# Altium PCB Arduino_4_Layer.PcbDoc
Units mil, origin at the board's own origin, x right, y up, seen from the top; angles counter-clockwise.
Board outline 2700 x 2200 mil, 4 copper layers (Top Layer, Layer 1, Layer 2, Bottom Layer), stack 23.756 mil thick; 54 components, 52 nets, 271 pads, 25 vias.
Unrouted connection lines stored in the file: 91.
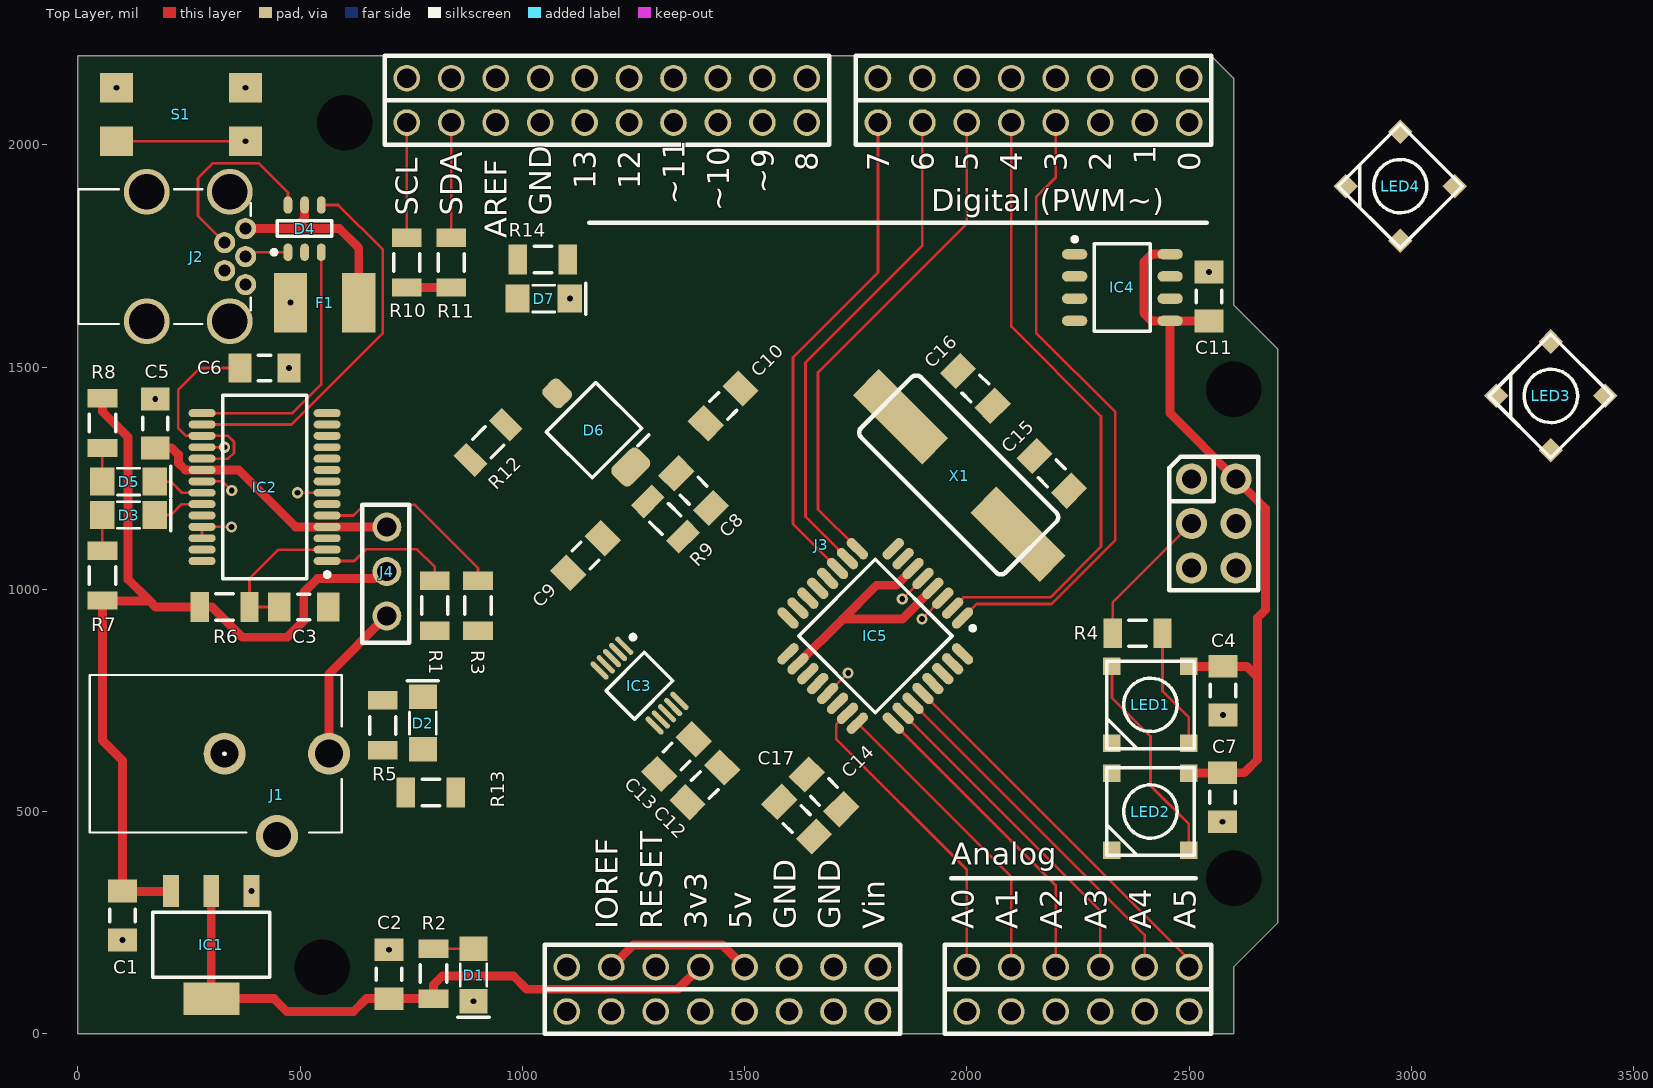
[diagram p0: Top Layer view]
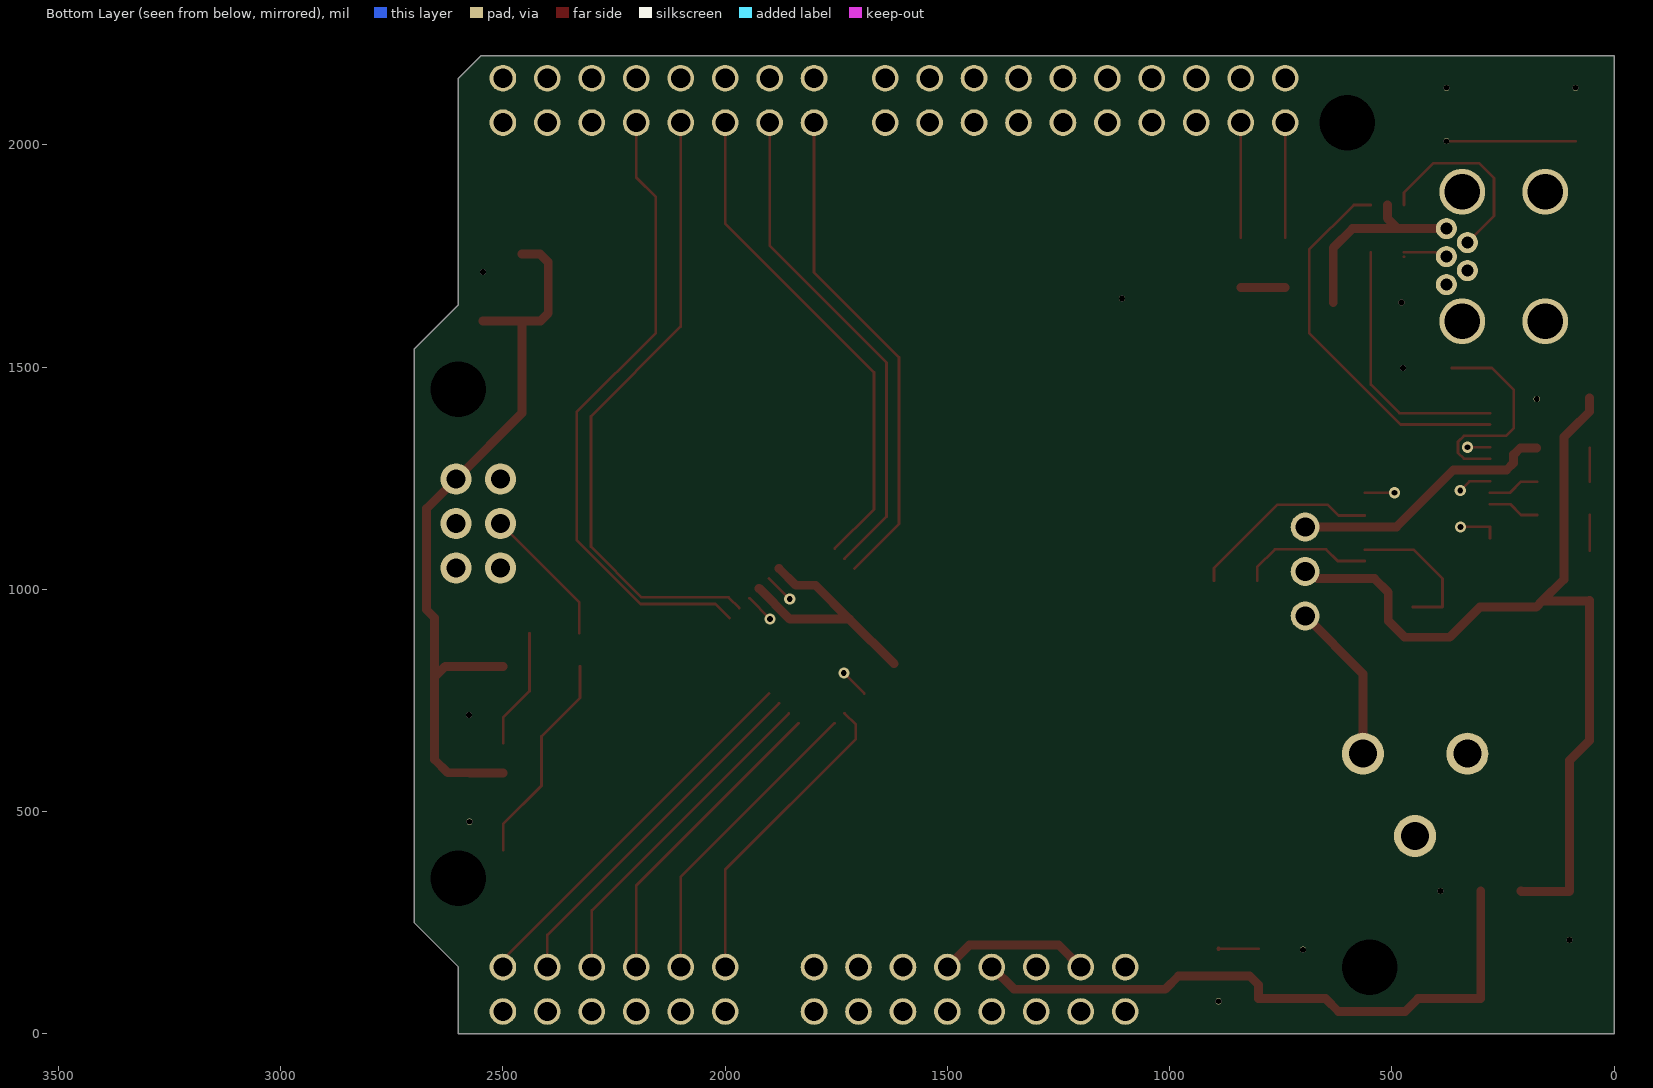
[diagram p1: Bottom Layer view, seen from below]
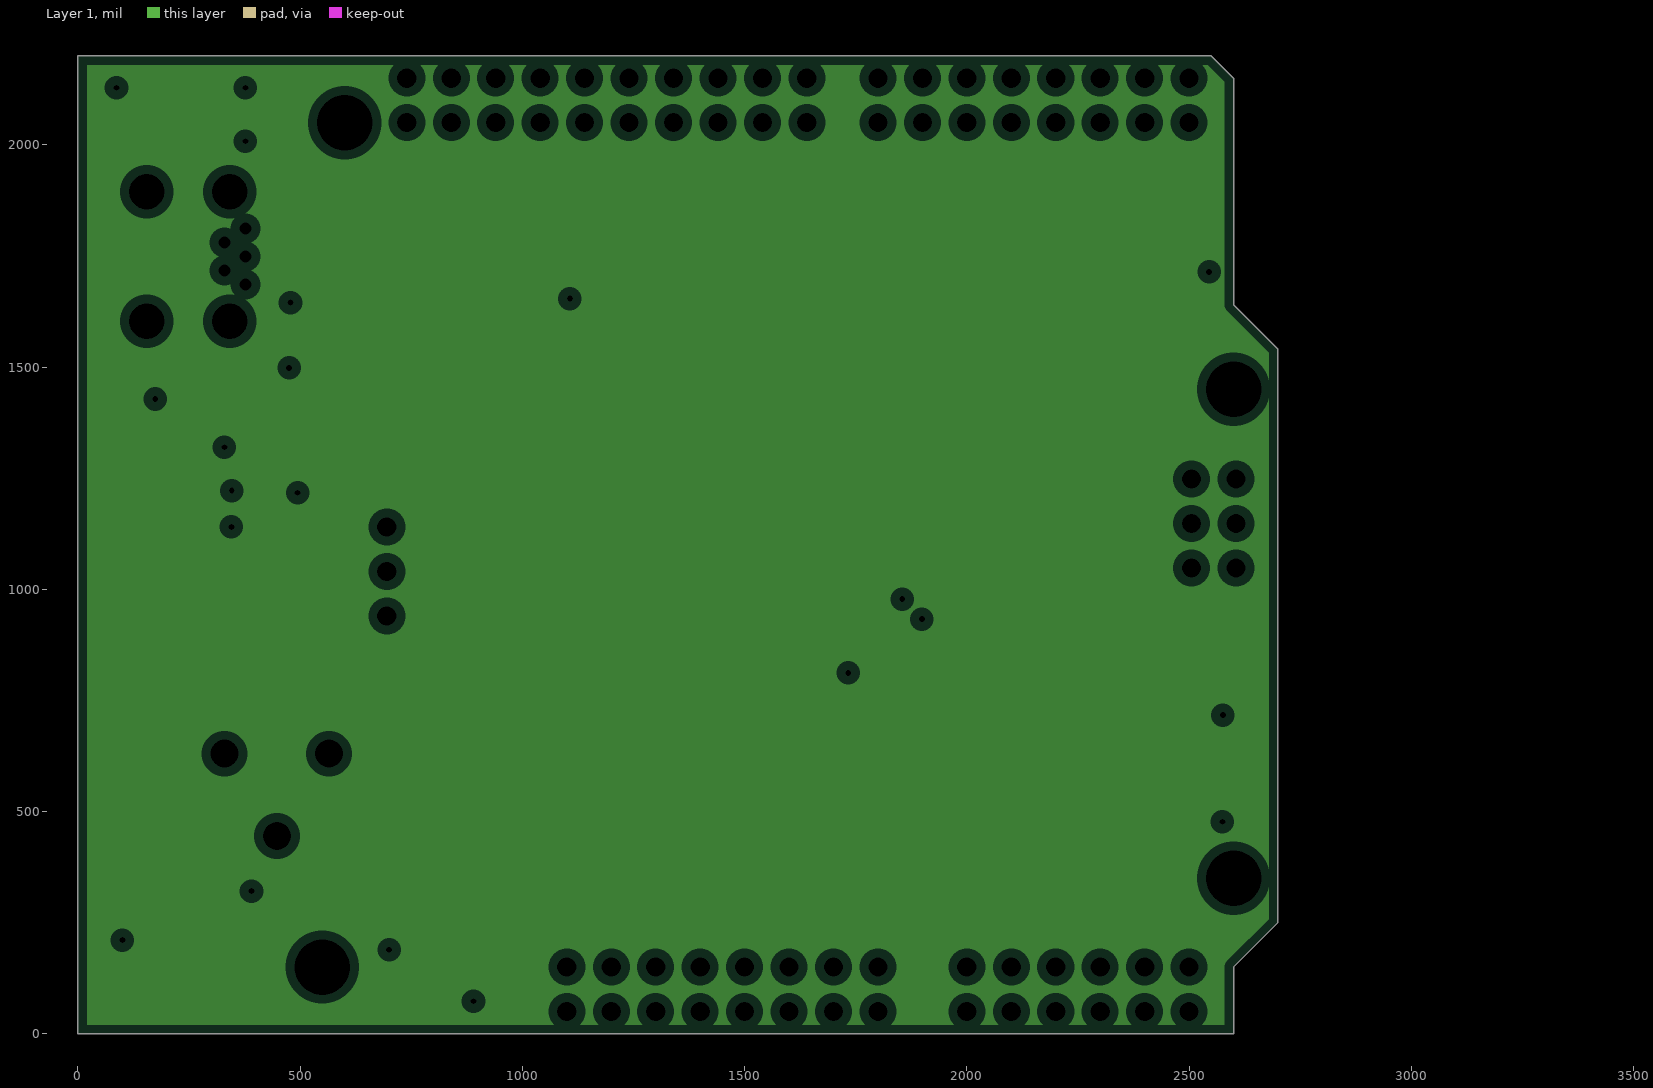
[diagram p2: Layer 1, clearances drawn from the general rule]
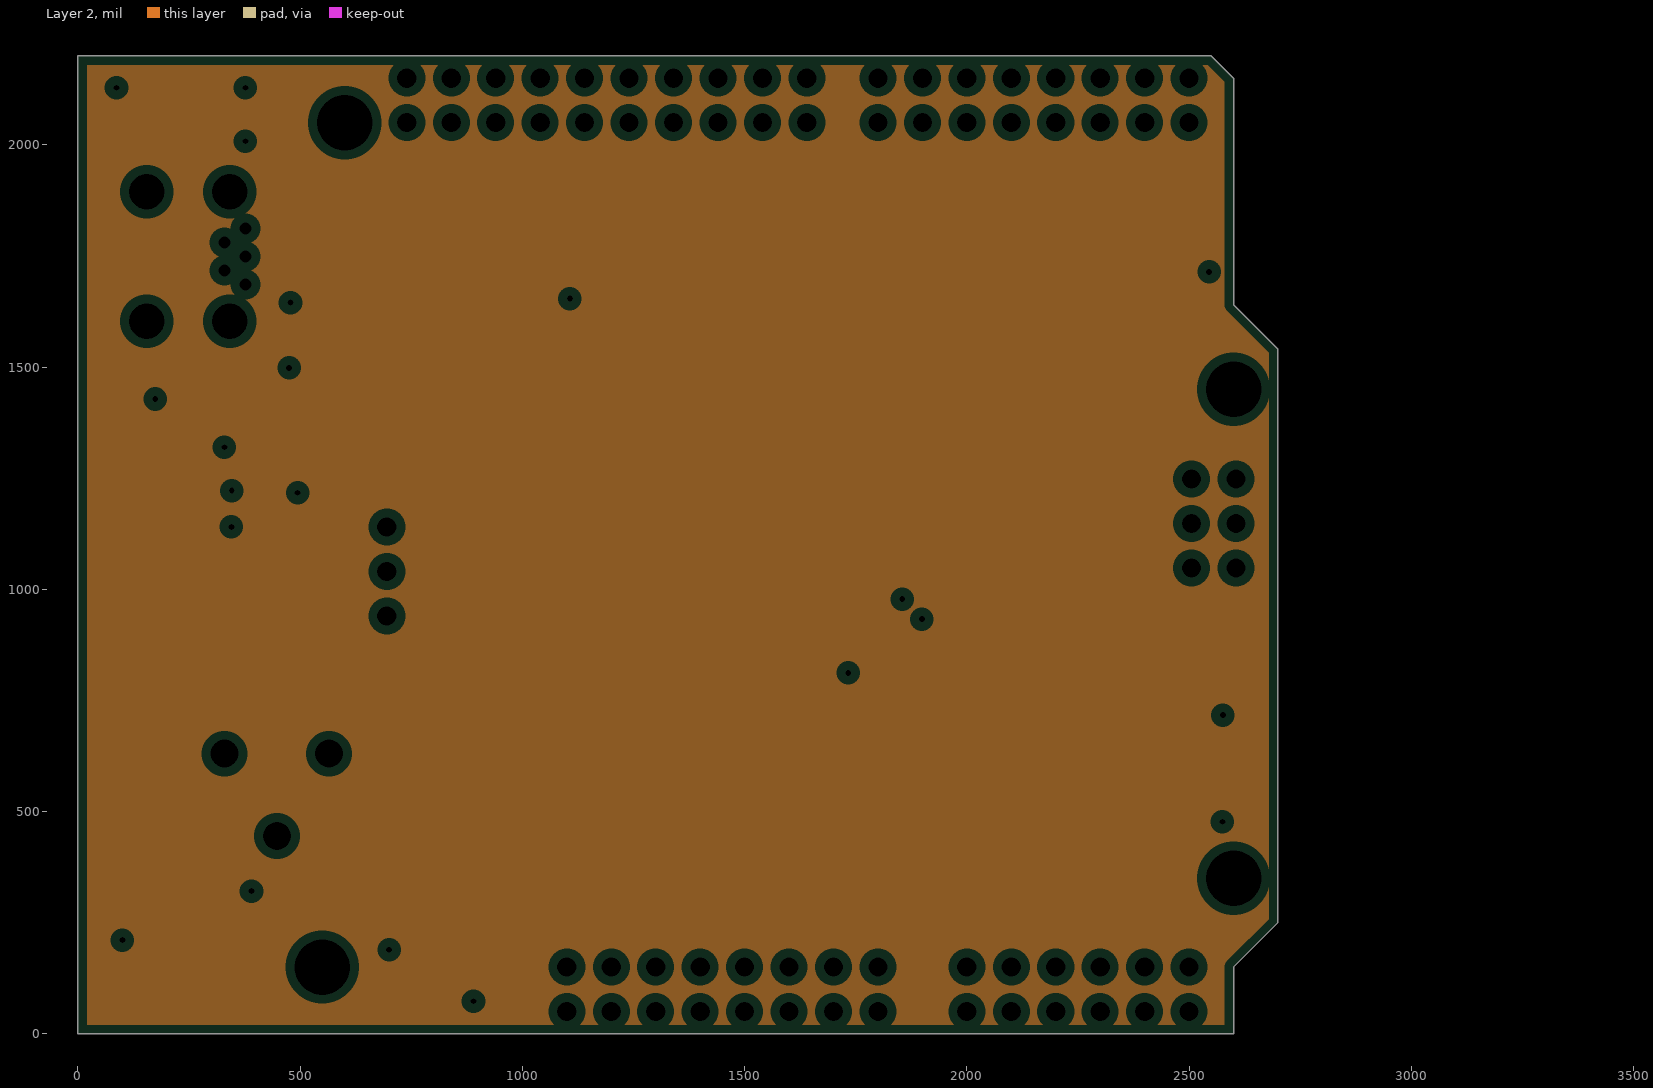
[diagram p3: Layer 2, clearances drawn from the general rule]

## Layer stack, top to bottom
Top Solder: solder mask 0.4, Solder Resist, Dk 3.5
Top Layer: signal copper 1.4
Dielectric 2: prepreg 2.8, PP-006, Dk 4.1
Layer 1: plane copper 1.3779
Dielectric 1: dielectric 12.6, FR-4, Dk 4.8
Layer 2: plane copper 1.3779
Dielectric 3: prepreg 2.8, PP-006, Dk 4.1
Bottom Layer: signal copper 1.4
Bottom Solder: solder mask 0.4, Solder Resist, Dk 3.5

## Board outline
2600,2150 2550,2200 0,2200 0,0 2600,0 2600,150 2700,250 2700,1540 2600,1640

## Design rules (kind name [scope] priority, off if disabled: settings)
Clearance [All] p1: gap=6 ignorepadtopadclearanceinfootprint=FALSE except(0: Arc-Hole Track-Hole SMDPad-Hole THPad-Hole Via-Hole Fill-Hole Poly-Hole Region-Hole Text-Hole)
PlaneClearance [All] p1: clearance=20
PlaneConnect [All] p1: pad.planeconnectstyle=Relief pad.reliefexpansion=20 pad.reliefentries=4 pad.reliefconductorwidth=10 pad.reliefairgap=10 via.planeconnectstyle=Direct via.reliefexpansion=20 via.reliefentries=4 via.reliefconductorwidth=10 via.reliefairgap=10
PolygonConnect [All] p1: connectstyle=Relief reliefconductorwidth=10 reliefentries=4 polygonreliefangle="90 Angle" airgapwidth=10
RoutingVias [All] p1: holewidth=13 width=25 viastyle="Through Hole" minholewidth=13 minwidth=25 maxholewidth=25 maxwidth=50
SolderMaskExpansion [All] p1: expansion=4
Width [All] p1: maxlimit=20 minlimit=6 preferedwidth=10 minimp=50.000000 maximp=50.000000 favimp=50.000000
28 further rules are at their usual default settings.

## Components (designator, comment, footprint, x,y, rotation, side; value= is the part's Value field where it differs from the comment)
C1 "22uF" CAP1206 100,265.94 r270 top value="CAP CER 22UF 16V X5R 1206"
C2 "22uF" CAP1206 700,134.06 r270 top value="CAP CER 22UF 16V X5R 1206"
C3 "1uF" CAP1206 508,960 r0 top value="CAP CER 1UF 16V X7R 1206"
C4 "22uF" CAP1206 2576,772 r90 top value="CAP CER 22UF 16V X5R 1206"
C5 "22uF" CAP1206 174,1373 r270 top value="CAP CER 22UF 16V X5R 1206"
C6 "22uF" CAP1206 420,1498 r180 top value="CAP CER 22UF 16V X5R 1206"
C7 "22uF" CAP1206 2575,532 r90 top value="CAP CER 22UF 16V X5R 1206"
C8 "22uF" CAP1206 1385.37,1221.78 r315 top value="CAP CER 22UF 16V X5R 1206"
C9 "22uF" CAP1206 1142,1076 r45 top value="CAP CER 22UF 16V X5R 1206"
C10 "22uF" CAP1206 1451.84,1412.7 r45 top value="CAP CER 22UF 16V X5R 1206"
C11 "22uF" CAP1206 2545,1659 r270 top value="CAP CER 22UF 16V X5R 1206"
C12 "22uF" CAP1206 1410.39,559.9 r45 top value="CAP CER 22UF 16V X5R 1206"
C13 "22uF" CAP1206 1346.75,623.54 r45 top value="CAP CER 22UF 16V X5R 1206"
C14 "22uF" CAP1206 1678.72,544.31 r135 top value="CAP CER 22UF 16V X5R 1206"
C15 "22pF" CAP1206 2191,1261 r315 top value="CAP CER 22PF 16V C0G/NP0 1206"
C16 "22pF" CAP1206 2019,1452 r135 top value="CAP CER 22PF 16V C0G/NP0 1206"
C17 "22uF" CAP1206 1617.2,482.79 r135 top value="CAP CER 22UF 16V X5R 1206"
D1 "Red" LED 890,132.14 r180 top value="LED RED CLEAR 1206 SMD"
D2 "Red" LED 776,699 r0 top value="LED RED CLEAR 1206 SMD"
D3 "Red" LED 114,1167 r270 top value="LED RED CLEAR 1206 SMD"
D4 "IP4234CZ6,125" TSOP-6 510,1811.5 r90 top value="TVS DIODE 5.5V 6TSOP"
D5 "Red" LED 114,1242 r270 top value="LED RED CLEAR 1206 SMD"
D6 "SFH 2430-Z" "SFH 2430" 1161,1358 r315 top
D7 "Red" LED 1048,1654 r270 top value="LED RED CLEAR 1206 SMD"
F1 "MF-MSMF050-2" FUSE 555,1645 r0 top value="PTC RESET FUSE 15V 500MA 1812"
IC1 "AZ1117CH-3.3TRG1" SOT223 300,200 r270 top value="IC REG LINEAR 3.3V 800MA SOT223"
IC2 "FT232RL" SOP65P780X200-28N 420,1230 r180 top value="IC USB FS SERIAL UART 28-SSOP"
IC3 "ADS1115IDGSR" VSSOP-10 1263.39,783.12 r315 top
IC4 "TMP36GSZ" SOIC-8 2350,1679 r0 top
IC5 "ATMEGA328P-ANR" TQFP-32 1794,895 r225 top value="IC MCU 8BIT 32KB FLASH 32TQFP"
J1 "Power Jack" Power_Jack 565,630 r180 top value="CONN PWR JACK 2X5.5MM SOLDER"
J2 "XM7D-0512" XM7D-0512 149.8,1894.17 r0 top value="CONN RCPT USB2.0 MINI B 5P R/A"
J3 "Arduino_Shield" ARDUINO_SHIELD 0,0 r0 top locked
J4 "PREC003SAAN-RC" 3_PIN 695,1140 r270 top value="CONN HEADER VERT 3POS 2.54MM"
LED1 "IN-PI55QATPRPGPBPW-60" PLCC_5x5 2413,740 r270 top
LED2 "IN-PI55QATPRPGPBPW-60" PLCC_5x5 2413,500 r270 top
LED3 "IN-PI55QATPRPGPBPW-60" PLCC_5x5 3314,1435 r225 top
LED4 "IN-PI55QATPRPGPBPW-60" PLCC_5x5 2975,1907 r225 top
R1 "1k" RES1206 803,963 r270 top value="RES 1K OHM 1% 1/2W 1206"
R2 "1k" RES1206 800,135.04 r270 top value="RES 1K OHM 1% 1/2W 1206"
R3 "1k" RES1206 900,963 r270 top value="RES 1K OHM 1% 1/2W 1206"
R4 "1k" RES1206 2384,901 r0 top value="RES 1K OHM 1% 1/2W 1206"
R5 "1k" RES1206 686,694 r90 top value="RES 1K OHM 1% 1/2W 1206"
R6 "1k" RES1206 330,960 r180 top value="RES 1K OHM 1% 1/2W 1206"
R7 "1k" RES1206 55,1031 r270 top value="RES 1K OHM 1% 1/2W 1206"
R8 "1k" RES1206 55,1374 r90 top value="RES 1K OHM 1% 1/2W 1206"
R9 "1k" RES1206 1321.73,1158.15 r315 top value="RES 1K OHM 1% 1/2W 1206"
R10 "1k" RES1206 740,1735 r270 top value="RES 1K OHM 1% 1/2W 1206"
R11 "1k" RES1206 840,1735 r270 top value="RES 1K OHM 1% 1/2W 1206"
R12 "100k" RES1206 922.92,1330.68 r45 top
R13 "1k" RES1206 794,543 r180 top value="RES 1K OHM 1% 1/2W 1206"
R14 "1k" RES1206 1046,1742 r0 top value="RES 1K OHM 1% 1/2W 1206"
S1 "TL3305AF160QG" Switch 230,2070 r90 top value="SWITCH TACTILE SPST-NO 50MA 12V"
X1 "16MHz" Crystal 1983,1256 r315 top value="CRYSTAL 16.0000MHZ 18PF SMD"

## Footprints (in the part's own frame and the unit in brackets; to place one, negate y for a bottom-side part, rotate by r counter-clockwise, add the part's x,y. Pads: shape width x height; smd on the part's side, far side on the other; paste and mask are expansions set on the pad)
3_PIN [mm]
  round 1.65 hole 1.1: 1(0,0) 2(2.54,0) 3(5.08,0)
  silkscreen extent -1.27,-1.4 6.6,1.27, body extent -1.28,-1.27 6.34,1.27, height 8.36
ARDUINO_SHIELD [mil]
  round 60 hole 43.31: A1(2000,150) A2(2100,150) A3(2200,150) A4(2300,150) A5(2400,150) A6(2500,150) B1(1800,150) B2(1700,150) B3(1600,150) B4(1500,150) B5(1400,150) B6(1300,150) B7(1200,150) B8(1100,150) C1(2500,2050) C2(2400,2050) C3(2300,2050) C4(2200,2050) C5(2100,2050) C6(2000,2050) C7(1900,2050) C8(1800,2050) D1(1640,2050) D2(1540,2050) D3(1440,2050) D4(1340,2050) D5(1240,2050) D6(1140,2050) D7(1040,2050) D8(940,2050) D9(840,2050) D10(740,2050) G(740,2150) G(840,2150) G(940,2150) G(1040,2150) G(1100,50) G(1140,2150) G(1200,50) G(1240,2150) G(1300,50) G(1340,2150) G(1400,50) G(1440,2150) G(1500,50) G(1540,2150) G(1600,50) G(1640,2150) G(1700,50) G(1800,50) G(1800,2150) G(1900,2150) G(2000,50) G(2000,2150) G(2100,50) G(2100,2150) G(2200,50) G(2200,2150) G(2300,50) G(2300,2150) G(2400,50) G(2400,2150) G(2500,50) G(2500,2150)
  round 70 hole 43.31: E1(2505.51,1248.03) E2(2605.51,1248.03) E3(2505.51,1148.03) E4(2605.51,1148.03) E5(2505.51,1048.03) E6(2605.51,1048.03)
  silkscreen extent 690,0 2656,2200, body extent 681,0 2654,2201, height 336
CAP1206 [mm] "Chip Capacitor, 2-Leads, Body 3.20x1.50mm, IPC Medium Density"
  rect 1.3x1.65 smd: 1(-1.4,0) 2(1.4,0)
  silkscreen extent -0.35,-0.72 0.35,0.72, body extent -1.7,-0.8 1.7,0.8, height 0.56
Crystal [mm]
  rect 5.6x2.1 smd: 1(-4.75,0) 2(4.75,0)
  silkscreen extent -5.89,-2.43 5.79,2.42, body extent -6.7,-2.43 6.6,2.42, height 4
FUSE [mm]
  rect 1.9x3.4 smd: 1(1.95,0) 2(-1.95,0)
  body extent -2.28,-1.62 2.27,1.62, height 0.68
LED [mil]
  rect 63x55 smd: 1(0,59) 2(0,-59)
  silkscreen extent -35,-25 35,95, body extent -31,-63 31,63, height 44
PLCC_5x5 [mm] "PLCC 5x5 LED"
  rect 1x1 smd: 1(-2.2,2.2) 2(-2.2,-2.2) 3(2.2,-2.2) 4(2.2,2.2)
  silkscreen extent -2.5,-2.5 2.5,2.5
Power_Jack [mm]
  round 2.4 hole 1.6: 1(0,0) 2(5.969,0) 3(2.977,4.7)
  silkscreen extent -0.72,-4.5 13.68,4.5, body extent -0.47,-4.49 14.15,5.28, height 10.68
RES1206 [mm] "Chip Resistor, 2-Leads, Body 3.10x1.60mm, IPC Medium Density"
  rect 1.05x1.7 smd: 1(-1.425,0) 2(1.425,0)
  silkscreen extent -0.5,-0.75 0.5,0.75, body extent -1.6,-0.85 1.6,0.85, height 0.65
"SFH 2430" [mm] "SOIC, 2-Leads, Body 3.85x4.40mm, Pitch 1.27mm, IPC Medium Density"
  rrect50% 1.5x1.3 smd: A(-2.975,0)
  rrect50% 1.5x2.1 smd: C(2.975,0)
  silkscreen extent -1.85,-2 2.41,2.03, body extent -2.83,-2 2.83,2, height 1.2
SOIC-8 [mm] "SOIC, 8-Leads, Body 4.90x3.90mm, Pitch 1.27mm, IPC Medium Density"
  oval 1.45x0.6 smd: 1(-2.725,1.905) 2(-2.725,0.635) 3(-2.725,-0.635) 4(-2.725,-1.905) 5(2.725,-1.905) 6(2.725,-0.635) 7(2.725,0.635) 8(2.725,1.905)
  silkscreen extent -2.85,-2.5 1.6,2.88, body extent -3,-2.5 3,2.5, height 1.75
SOP65P780X200-28N [mm] "SOP, 28-Leads, Body 10.28x5.30mm, Pitch 0.65mm, IPC Medium Density"
  oval 1.55x0.45 smd mask+0.05: 1(-3.575,4.225) 2(-3.575,3.575) 3(-3.575,2.925) 4(-3.575,2.275) 5(-3.575,1.625) 6(-3.575,0.975) 7(-3.575,0.325) 8(-3.575,-0.325) 9(-3.575,-0.975) 10(-3.575,-1.625) 11(-3.575,-2.275) 12(-3.575,-2.925) 13(-3.575,-3.575) 14(-3.575,-4.225) 15(3.575,-4.225) 16(3.575,-3.575) 17(3.575,-2.925) 18(3.575,-2.275) 19(3.575,-1.625) 20(3.575,-0.975) 21(3.575,-0.325) 22(3.575,0.325) 23(3.575,0.975) 24(3.575,1.625) 25(3.575,2.275) 26(3.575,2.925) 27(3.575,3.575) 28(3.575,4.225)
  silkscreen extent -3.7,-5.25 2.4,5.25, body extent -3.89,-5.25 3.89,5.25, height 2
SOT223 [mm] "SOT223, 4-Leads, Body 6.50x7.00mm (avg), Pitch 2.30mm, IPC Medium Density"
  rect 1.85x0.9 smd: 1(-3.075,2.3) 2(-3.075,0) 3(-3.075,-2.3)
  rect 1.85x3.2 smd: 4(3.075,0)
  silkscreen extent -1.85,-3.35 1.85,3.35, body extent -3.5,-3.35 3.5,3.35, height 1.8
Switch [mm]
  rect 1.7x1.9 smd: 1(1.479,-3.727) 2(1.479,3.639) 3(-1.569,-3.727) 4(-1.569,3.639)
  body extent -2.3,-3.75 2.2,3.75, height 3.8
TQFP-32 [mm] "TQFP, 32-Leads, Body 7.00x7.00mm, Pitch 0.80mm, IPC Medium Density"
  oval 1.5x0.55 smd mask+0.05: 1(-4.25,2.8) 2(-4.25,2) 3(-4.25,1.2) 4(-4.25,0.4) 5(-4.25,-0.4) 6(-4.25,-1.2) 7(-4.25,-2) 8(-4.25,-2.8) 17(4.25,-2.8) 18(4.25,-2) 19(4.25,-1.2) 20(4.25,-0.4) 21(4.25,0.4) 22(4.25,1.2) 23(4.25,2) 24(4.25,2.8)
  oval 0.55x1.5 smd mask+0.05: 9(-2.8,-4.25) 10(-2,-4.25) 11(-1.2,-4.25) 12(-0.4,-4.25) 13(0.4,-4.25) 14(1.2,-4.25) 15(2,-4.25) 16(2.8,-4.25) 25(2.8,4.25) 26(2,4.25) 27(1.2,4.25) 28(0.4,4.25) 29(-0.4,4.25) 30(-1.2,4.25) 31(-2,4.25) 32(-2.8,4.25)
  silkscreen extent -4.37,-3.1 3.1,3.75, body extent -4.5,-4.5 4.5,4.5, height 1.2
TSOP-6 [mm] "TSOP, 6-Leads, Body 2.90x1.50mm, Pitch 0.95mm, IPC Medium Density"
  oval 1x0.5 smd: 1(-1.35,0.95) 2(-1.35,0) 3(-1.35,-0.95) 4(1.35,-0.95) 5(1.35,0) 6(1.35,0.95)
  silkscreen extent -1.47,-1.55 0.45,1.87, body extent -1.38,-1.55 1.38,1.55, height 1.1
VSSOP-10 [mm] "TSSOP, 10-Leads, Body 3.00x3.00mm, Pitch 0.50mm, IPC Medium Density"
  oval 1.35x0.3 smd mask+0.05: 1(-2.225,1) 2(-2.225,0.5) 3(-2.225,0) 4(-2.225,-0.5) 5(-2.225,-1) 6(2.225,-1) 7(2.225,-0.5) 8(2.225,0) 9(2.225,0.5) 10(2.225,1)
  silkscreen extent -2.35,-1.55 1.15,1.82, body extent -2.45,-1.55 2.45,1.55, height 1.1
XM7D-0512 [mm]
  round 1.208 hole 0.7 mask+0.05: 1(5.777,-2.1) 2(4.577,-2.9) 3(5.777,-3.7) 4(4.577,-4.5) 5(5.777,-5.3)
  round 2.616 hole 2.032: SH1(0.127,-7.4) SH2(4.877,-7.4) SH3(4.877,0) SH4(0.127,0)
  silkscreen extent -3.77,-7.55 6.08,0.15, body extent -3.8,-7.75 6.05,0.35, height 3.95

## Part data
C1 C2 C4 C5 C6 C7 C8 C9 C10 C11 C12 C13 C14 C17: library part 1206_22uF, "22µF ±20% 16V Ceramic Capacitor X5R 1206 (3216 Metric)", Digikey Link=https://www.digikey.com/product-detail/en/CL31A226MOCLNNC/1276-2728-1-ND/3890814/?itemSeq=304982363, Digikey Part=1276-2728-1-ND
C3: library part 1206_1uF, "1µF ±20% 16V Ceramic Capacitor X7R 1206 (3216 Metric)", Digikey Link=https://www.digikey.com/product-detail/en/C1206C105M4RACTU/399-8150-1-ND/3471873/?itemSeq=304982366, Digikey Part=399-8150-1-ND
C15 C16: library part 1206_22pF, "22pF ±5% 16V Ceramic Capacitor C0G, NP0 1206 (3216 Metric)", Digikey Link=https://www.digikey.com/product-detail/en/885012008011/732-7867-1-ND/5454494/?itemSeq=304982362, Digikey Part=732-7867-1-ND
D1 D2 D3 D5 D7: library part 1206_RED_LED, "Red 638nm LED Indication - Discrete 1.8V 1206 (3216 Metric)", Digikey Link=https://www.digikey.com/product-detail/en/LTST-C150CKT/160-1167-1-ND/269239/?itemSeq=304982368, Digikey Part=160-1167-1-ND
D4: library part TVS_Diode, "Clamp Ipp Tvs Diode Surface Mount 6-TSOP", Digikey Link=https://www.digikey.com/product-detail/en/IP4234CZ6%2c125/1727-4717-1-ND/2531156/?itemSeq=304982369, Digikey Part=1727-4717-1-ND
D6: "Ambient Light Sensor Photodiode Chip 570nm 0.17A/W Sensitivity Automotive 2-Pin DIL SMT", Case/Package=SMD/SMT, Dark Current=100pA, Forward Current=100mA, Forward Voltage=1.2V, Manufacturer="Osram Opto", Max Operating Temperature=100°C, Max Power Dissipation=150mW, Max Reverse Voltage (DC)=6V, Min Operating Temperature=-40°C, Package Quantity=1500, ComponentLink1Description=https://datasheet.ciiva.com/1249/00049208-0-1249200.pdf?src-supplier=Avnet, ComponentLink1URL=https://datasheet.ciiva.com/1249/00049208-0-1249200.pdf?src-supplier=Avnet, ComponentLink2Description=https://datasheet.ciiva.com/4697/fh2430-pb-free-2011-10-14-57278-4697621.pdf?src-supplier=Mouser, ComponentLink2URL=https://datasheet.ciiva.com/4697/fh2430-pb-free-2011-10-14-57278-4697621.pdf?src-supplier=Mouser, ComponentLink3Description=https://datasheet.ciiva.com/15117/getdatasheetpartid-572445-15117163.pdf?src-supplier=Verical, ComponentLink3URL=https://datasheet.ciiva.com/15117/getdatasheetpartid-572445-15117163.pdf?src-supplier=Verical, ComponentLink4Description=https://datasheet.ciiva.com/2819/00083291-0-2819841.pdf?src-supplier=Digi-Key, ComponentLink4URL=https://datasheet.ciiva.com/2819/00083291-0-2819841.pdf?src-supplier=Digi-Key, ComponentLink5Description=https://datasheet.ciiva.com/2819/00083291-0-2819842.pdf?src-supplier=Digi-Key, ComponentLink5URL=https://datasheet.ciiva.com/2819/00083291-0-2819842.pdf?src-supplier=Digi-Key, ComponentLink6Description=https://datasheet.ciiva.com/2819/00083291-0-2819843.pdf?src-supplier=Digi-Key, ComponentLink6URL=https://datasheet.ciiva.com/2819/00083291-0-2819843.pdf?src-supplier=Digi-Key, ComponentLink7Description=http://datasheet.octopart.com/Q65110-A2673-Osram-datasheet-13705788.pdf?src-supplier=_legacy+Avnet, ComponentLink7URL=http://datasheet.octopart.com/Q65110-A2673-Osram-datasheet-13705788.pdf?src-supplier=_legacy+Avnet, Diode Type=PIN, Fall Time=200us, Height=1.2mm, Length=4.5mm, Manufacturer Part Number="SFH 2430-Z", Mount="Surface Mount", Number of Pins=2, Packaging="Tape and Reel", Pricing 1="1=1.86000, 10=1.51200, 100=0.93020, 500=0.79066 (USD)", Radiation Hardening=No, Response Time=200us, Reverse Voltage (DC)=6V, Rise Time=200us, Stock 1=19614, Supplier 1=Digi-Key, Viewing Angle=120°, Wavelength=570nm, Width=4mm
F1: library part Fuse, "Polymeric PTC Resettable Fuse 15V 500mA Ih Surface Mount 1812 (4532 Metric), Concave", Digikey Link=https://www.digikey.com/product-detail/en/MF-MSMF050-2/MF-MSMF050-2CT-ND/662842/?itemSeq=304982360, Digikey Part=MF-MSMF050-2CT-ND
IC1: library part 3.3V_LDO, "Linear Voltage Regulator IC Positive Fixed 1 Output 1A SOT-223", Digikey Link=https://www.digikey.com/product-detail/en/AZ1117CH-3.3TRG1/AZ1117CH-3.3TRG1DICT-ND/4505206/?itemSeq=304982370, Digikey Part=AZ1117CH-3.3TRG1DICT-ND
IC2: library part FTDI, "USB Bridge, USB to UART USB 2.0 UART Interface 28-SSOP", Digikey Link=https://www.digikey.com/product-detail/en/FT232RL-REEL/768-1007-1-ND/1836402/?itemSeq=304982359, Digikey Part=768-1007-1-ND
IC3: "4-Channel Single ADC Delta-Sigma 860sps 16-bit Serial 10-Pin VSSOP T/R", Case/Package=VSSOP, Manufacturer="Texas Instruments", Max Operating Temperature=125°C, Max Supply Voltage=5.5V, Min Operating Temperature=-40°C, Min Supply Voltage=2V, Package Quantity=2500, Power Dissipation=900uW, ComponentLink1Description=https://datasheet.ciiva.com/4031/47725463s8438921n7713-4031028.pdf?src-supplier=Arrow, ComponentLink1URL=https://datasheet.ciiva.com/4031/47725463s8438921n7713-4031028.pdf?src-supplier=Arrow, ComponentLink2Description=https://datasheet.ciiva.com/1304/ads1113-1304266.pdf?src-supplier=Digi-Key, ComponentLink2URL=https://datasheet.ciiva.com/1304/ads1113-1304266.pdf?src-supplier=Digi-Key, ComponentLink3Description=https://datasheet.ciiva.com/25993/sbas444b-25993205.pdf?src-supplier=Avnet+Europe, ComponentLink3URL=https://datasheet.ciiva.com/25993/sbas444b-25993205.pdf?src-supplier=Avnet+Europe, ComponentLink4Description=https://octopart.com/click/track?ai=2118&ct=datasheets&sig=0bc4b7d&at=physicalpart&sid=370&ppid=12194578&hlid=24870511&src-supplier=TI+store, ComponentLink4URL=https://octopart.com/click/track?ai=2118&ct=datasheets&sig=0bc4b7d&at=physicalpart&sid=370&ppid=12194578&hlid=24870511&src-supplier=TI+store, ComponentLink5Description=http://datasheet.octopart.com/ADS1115IDGSR-Texas-Instruments-datasheet-21818186.pdf?src-supplier=Newark, ComponentLink5URL=http://datasheet.octopart.com/ADS1115IDGSR-Texas-Instruments-datasheet-21818186.pdf?src-supplier=Newark, ComponentLink6Description=http://datasheet.octopart.com/ADS1115IDGSR-Texas-Instruments-datasheet-10258908.pdf?src-supplier=TI+store, ComponentLink6URL=http://datasheet.octopart.com/ADS1115IDGSR-Texas-Instruments-datasheet-10258908.pdf?src-supplier=TI+store, ComponentLink7Description=http://datasheet.octopart.com/ADS1115IDGSR-Texas-Instruments-datasheet-10254488.pdf?src-supplier=TI+store, ComponentLink7URL=http://datasheet.octopart.com/ADS1115IDGSR-Texas-Instruments-datasheet-10254488.pdf?src-supplier=TI+store, ComponentLink8Description=http://sigma.octopart.com/49250172/technical_drawing/Texas-Instruments-ADS1115IDGSR.pdf?src-supplier=TI+store, ComponentLink8URL=http://sigma.octopart.com/49250172/technical_drawing/Texas-Instruments-ADS1115IDGSR.pdf?src-supplier=TI+store, ComponentLink9Description=http://datasheet.octopart.com/ADS1115IDGSR-Texas-Instruments-datasheet-14070808.pdf?src-supplier=IIIC, ComponentLink9URL=http://datasheet.octopart.com/ADS1115IDGSR-Texas-Instruments-datasheet-14070808.pdf?src-supplier=IIIC, ComponentLink10Description=http://datasheet.octopart.com/ADS1115IDGSR-Texas-Instruments-datasheet-78774318.pdf?src-supplier=Farnell, ComponentLink10URL=http://datasheet.octopart.com/ADS1115IDGSR-Texas-Instruments-datasheet-78774318.pdf?src-supplier=Farnell, Contact Plating=Gold, Conversion Rate=0.86KS/s, Integral Nonlinearity (INL)=1LSB, Interface=I2C, Lead Free="Lead Free", Manufacturer Part Number=ADS1115IDGSR, Max Supply Voltage (DC)=5.5V, Min Supply Voltage (DC)=2V, Number of A/D Converters=1, Number of Bits=16, Number of Converters=1, Number of Inputs=4, Number of Pins=10, Packaging="Tape and Reel", Polarity=Bipolar, Pricing 1="1=5.52000, 10=4.96200, 100=3.85670, 500=3.33556, 1000=2.77268 (USD)", Radiation Hardening=No, REACH SVHC="No SVHC", Resolution=16b, Sampling Rate=860S/s, Stock 1=14647, Supplier 1=Digi-Key, Supply Type=Single
IC4: "Temp Sensor Analog(Voltage) Serial (2-Wire) 8-Pin SOIC N Tube", Case/Package=R, Manufacturer="Analog Devices", Max Operating Temperature=125°C, Max Supply Voltage=5.5V, Min Operating Temperature=-40°C, Min Supply Voltage=2.7V, Nominal Supply Current=50uA, Output Current=50A, Package Quantity=98, ComponentLink1Description=https://datasheet.ciiva.com/15098/getdatasheetpartid-116076-15098223.pdf?src-supplier=Verical, ComponentLink1URL=https://datasheet.ciiva.com/15098/getdatasheetpartid-116076-15098223.pdf?src-supplier=Verical, ComponentLink2Description=https://datasheet.ciiva.com/1514/1793789-1514118.pdf?src-supplier=Element14, ComponentLink2URL=https://datasheet.ciiva.com/1514/1793789-1514118.pdf?src-supplier=Element14, ComponentLink3Description=https://datasheet.ciiva.com/3278/tmp35-36-37-3278025.pdf?src-supplier=Avnet, ComponentLink3URL=https://datasheet.ciiva.com/3278/tmp35-36-37-3278025.pdf?src-supplier=Avnet, ComponentLink4Description=https://datasheet.ciiva.com/7992/1793789-7992346.pdf?src-supplier=Element14, ComponentLink4URL=https://datasheet.ciiva.com/7992/1793789-7992346.pdf?src-supplier=Element14, ComponentLink5Description=https://datasheet.ciiva.com/16219/tmp35-36-37-246343-16219643.pdf?src-supplier=Mouser, ComponentLink5URL=https://datasheet.ciiva.com/16219/tmp35-36-37-246343-16219643.pdf?src-supplier=Mouser, ComponentLink6Description=https://datasheet.ciiva.com/16636/tmp35-36-37-16636046.pdf?src-supplier=Avnet+Europe, ComponentLink6URL=https://datasheet.ciiva.com/16636/tmp35-36-37-16636046.pdf?src-supplier=Avnet+Europe, ComponentLink7Description=https://datasheet.ciiva.com/2847/tmp35-36-37-2847519.pdf?src-supplier=Digi-Key, ComponentLink7URL=https://datasheet.ciiva.com/2847/tmp35-36-37-2847519.pdf?src-supplier=Digi-Key, ComponentLink8Description=http://datasheet.octopart.com/TMP36GSZ-Analog-Devices-datasheet-5402947.pdf?src-supplier=Newark, ComponentLink8URL=http://datasheet.octopart.com/TMP36GSZ-Analog-Devices-datasheet-5402947.pdf?src-supplier=Newark, ComponentLink9Description=http://datasheet.octopart.com/TMP36GSZ-Analog-Devices-datasheet-10538785.pdf?src-supplier=Newark, ComponentLink9URL=http://datasheet.octopart.com/TMP36GSZ-Analog-Devices-datasheet-10538785.pdf?src-supplier=Newark, ComponentLink10Description=http://datasheet.octopart.com/TMP36GSZ-Analog-Devices-datasheet-22148775.pdf?src-supplier=Newark, ComponentLink10URL=http://datasheet.octopart.com/TMP36GSZ-Analog-Devices-datasheet-22148775.pdf?src-supplier=Newark, ComponentLink11Description=http://datasheet.octopart.com/TMP36GSZ-Analog-Devices-datasheet-43345165.pdf?src-supplier=Farnell, ComponentLink11URL=http://datasheet.octopart.com/TMP36GSZ-Analog-Devices-datasheet-43345165.pdf?src-supplier=Farnell, ComponentLink12Description=http://datasheet.octopart.com/TMP36GSZ-Analog-Devices-datasheet-120101.pdf?src-supplier=Digi-Key, ComponentLink12URL=http://datasheet.octopart.com/TMP36GSZ-Analog-Devices-datasheet-120101.pdf?src-supplier=Digi-Key, ComponentLink13Description=http://datasheet.octopart.com/TMP36GSZ-Analog-Devices-datasheet-14184915.pdf?src-supplier=IIIC, ComponentLink13URL=http://datasheet.octopart.com/TMP36GSZ-Analog-Devices-datasheet-14184915.pdf?src-supplier=IIIC, Height=1.5mm, Interface=Analog, Lead Free="Contains Lead", Length=5mm, Manufacturer Part Number=TMP36GSZ, Number of Pins=8, Operating Supply Current=50uA, Output Type=Analog, Packaging=Rail/Tube, Pricing 1="1=1.48000, 10=1.32500, 25=1.25000, 100=1.06500, 500=0.87500, 1000=0.72500, 5000=0.70000 (USD)", Quiescent Current=50uA, Radiation Hardening=No, REACH SVHC="No SVHC", Stock 1=1242, Supplier 1=Digi-Key, Termination=SMD/SMT, Width=4mm
IC5: library part ATMega328P, "AVR AVR® ATmega Microcontroller IC 8-Bit 20MHz 32KB (16K x 16) FLASH 32-TQFP (7x7)", Digikey Link=https://www.digikey.com/product-detail/en/ATMEGA328P-ANR/ATMEGA328P-ANRCT-ND/2774230/?itemSeq=304982365, Digikey Part=ATMEGA328P-ANRCT-ND
J1: "Power Barrel Connector Jack 2.10mm ID (0.083\"), 5.50mm OD (0.217\") Through Hole, Right Angle", Digikey Link=https://www.digikey.com/product-detail/en/PJ-102A/CP-102A-ND/275425/?itemSeq=304982367, Digikey Part=CP-102A-ND
J2: library part USB, "USB - mini B USB 2.0 Receptacle Connector 5 Position Through Hole, Right Angle", Digikey Link=https://www.digikey.com/product-detail/en/XM7D-0512/OR1205-ND/4695531/?itemSeq=304982356, Digikey Part=OR1205-ND
J4: library part 3_PIN, "Connector Header Through Hole 3 position 0.100\" (2.54mm)", Digikey Link=https://www.digikey.com/product-detail/en/PREC003SAAN-RC/S1012EC-03-ND/2774851/?itemSeq=304982371, Digikey Part=S1012EC-03-ND
LED1 LED2 LED3 LED4: "Top View Plcc 5.0X5.0X1.6 4-PIN", Manufacturer=Inolux, Manufacturer Part Number=IN-PI55QATPRPGPBPW-60, Pricing 1="1=0.76000, 10=0.59400, 100=0.38160, 500=0.32224 (USD)", Stock 1=231, Supplier 1=Digi-Key
R1 R2 R3 R4 R5 R6 R7 R8 R9 R10 R11 R13 R14: library part 1206_1K, "1 kOhms ±1% 0.5W, 1/2W Chip Resistor 1206 (3216 Metric) Anti-Sulfur, Moisture Resistant Thin Film", Digikey Link=https://www.digikey.com/product-detail/en/RNCP1206FTD1K00/RNCP1206FTD1K00CT-ND/2240675/?itemSeq=304982373, Digikey Part=RNCP1206FTD1K00CT-ND
R12: library part 1206_100k, "100 kOhms ±5% 0.25W, 1/4W Chip Resistor 1206 (3216 Metric) Automotive AEC-Q200 Thick Film"
S1: library part Push_Button, "Tactile Switch SPST-NO Top Actuated Surface Mount", Digikey Link=https://www.digikey.com/product-detail/en/TL3305AF160QG/EG5350CT-ND/5816195/?itemSeq=304982361, Digikey Part=EG5350CT-ND
X1: library part 16MHz_Crystal, "16MHz ±30ppm Crystal 18pF 40 Ohms HC-49/US", Digikey Link=https://www.digikey.com/product-detail/en/ABLS-16.000MHZ-B4-T/535-10226-1-ND/2184261/?itemSeq=304982364, Digikey Part=535-10226-1-ND

## Via types
v1: diameter 25/13.78 (per signal layer), hole 13, Top Layer to Bottom Layer, 14 vias
v2: diameter 25, hole 13, Top Layer to Bottom Layer, 7 vias
v3: diameter 13.78/13.78 (per signal layer), hole 125, Top Layer to Bottom Layer, 4 vias

## Nets (pads, with @x,y where several pads share a name; then routed paths per layer and width w, separated by ;. In a path a pad name is that pad's centre, name@x,y a point inside that pad or via, vN(x,y) a via of type N, cw(c..) or ccw(c..) an arc to the next point about the centre after c; other vN are vias at no path point)
3V3: C2.2 IC1.2 IC1.4 J3.B5 R2.2 | length 1438.6
  Top Layer w20: IC1.2 IC1.4 441.06,78.94 470,50 620,50 648.94,78.94 C2.2 R2.2 800,110 820,130 980,130 1010,100 1350,100 J3.B5
5V: J1.1 J4.3 | length 363.8
  Top Layer w20: J1.1 565,810 J4.3
5VUSB: C5.2 F1.2 IC2.4 IC2.20 J4.1 | length 605.6
  Top Layer w20: C5.2 211.12,1317.88 226,1303 226,1284.36 241.97,1268.39 IC2.20 361.61,1268.39 489.57,1140.43 IC2.4 694.57,1140.43 J4.1
  other v1: 478.23,1645
AD0: IC5.23 J3.A1 | length 703.3
  Top Layer w6: IC5.23 1706,695.64 1706,663 2000,369 J3.A1
AD1: IC5.24 J3.A2 | length 692.2
  Top Layer w6: IC5.24 2100,352.37 J3.A2
AD2: IC5.25 J3.A3 | length 700.2
  Top Layer w6: IC5.25 2200,333.1 J3.A3
AD3: IC5.26 J3.A4 | length 754.7
  Top Layer w6: IC5.26 2300,277.64 J3.A4
AREF: C14.2 IC5.20 J3.D8
D+: D4.1 J2.3 | length 99.4
  Top Layer w6: J2.3 385.2,1756.46 399.65,1756.46 401.54,1758.35 D4.1
D-: D4.6 J2.2 | length 441.6
  Top Layer w6: J2.2 270,1840 270,1925 303.67,1958.67 406.33,1958.67 472.6,1892.4 D4.6
DTR: C3.1 IC2.2 R6.1 | length 332.5
  Top Layer w6: C3.1 R6.1 386.1,1024.1 451.25,1089.25 IC2.2
GND: C1.2 C2.1 C4.1 C5.1 C6.1 C7.1 C8.2 C9.1 C10.1 C11.1 C12.1 C13.1 C14.1 C15.1 C16.1 C17.1 D1.1 D2.1 D4.2 D7.1 IC1.1 IC2.7 IC2.18 IC2.21 IC2.25 IC2.26 IC3.1 IC3.3 IC3.5 IC3.6 IC4.4 IC5.3 IC5.5 IC5.21 J1.2 J2.5 J2.SH1 J2.SH2 J2.SH3 J2.SH4 J3.B2 J3.B3 J3.D7 J3.E6 LED1.3 LED2.3 LED3.3 LED4.3 R12.1 S1.1 S1.2 | length 481.3
  Top Layer w6: IC2.26 IC2.25 v2(345.43,1140.43) ; IC2.21 325.2,1242.8 v2(346,1222) ; IC2.18 v2(329.57,1319.57) ; v2(494.2,1217.2) IC2.7 ; IC5.21 v2(1733,811.73) ; v2(1854.73,978) IC5.5 ; v2(1898.81,933) IC5.3
  other v1: 890,73.14 700,189.17 100,210.83 390.55,321.06 2575,476.88 2576,716.88 174,1428.12 475.12,1498 1107,1654 2545,1714.12 86.74,2128.23 376.74,2128.23
IO2: IC5.32 J3.C3
IO3: IC5.1 J3.C4 | length 1447.4
  Top Layer w6: IC5.1 2021.9,967 2190,967 2334,1111 2334,1399 2156,1577 2156,1883 2200,1927 J3.C4
IO4: IC5.2 J3.C5 | length 1429
  Top Layer w6: IC5.2 1968.2,957.64 1992.56,982 2188.03,982 2302,1095.97 2302,1389 2100,1591 J3.C5
IO5: IC5.9 J3.C6 | length 1134.2
  Top Layer w6: IC5.9 1665,1179.9 1665,1488 2000,1823 J3.C6
IO6: IC5.10 J3.C7 | length 1129
  Top Layer w6: IC5.10 1637,1163.36 1637,1510 1900,1773 J3.C7
IO7: IC5.11 J3.C8 | length 1123.9
  Top Layer w6: IC5.11 1609,1146.81 1609,1522 1800,1713 J3.C8
IO8: IC5.12 J3.D1
IO9: IC5.13 J3.D2
MISO: IC5.16 J3.D5 J3.E1
MOSI: IC5.15 J3.D4 J3.E4
NetC6_2: C6.2 IC2.17 IC2.19 | length 485.8
  Top Layer w6: IC2.19 337.98,1293.98 351.07,1307.07 351.07,1331.93 337.84,1345.16 IC2.17 242.84,1345.16 226,1362 226,1449 275,1498 C6.2
NetC8_1: C8.1 D6.C R9.1
NetC15_2: C15.2 IC5.7 X1.2
NetC16_2: C16.2 IC5.8 X1.1
NetD1_2: D1.2 R2.1 | length 90
  Top Layer w6: R2.1 D1.2
NetD2_2: D2.2 R5.1
NetD3_1: D3.1 IC2.23 | length 116.4
  Top Layer w6: D3.1 209,1167 233.61,1191.61 IC2.23
NetD3_2: D3.2 R7.1 | length 79.9
  Top Layer w6: R7.1 D3.2
NetD5_1: D5.1 IC2.22 | length 116.5
  Top Layer w6: D5.1 209,1242 233.8,1217.2 IC2.22
NetD5_2: D5.2 R8.1 | length 75.9
  Top Layer w6: D5.2 R8.1
NetD6_A: D6.A IC3.4 R12.2
NetD7_2: D7.2 R14.1
NetIC2_1: IC2.1 R1.1 | length 300.6
  Top Layer w6: IC2.1 621.66,1063.66 648,1090 763,1090 803,1050 R1.1
NetIC2_5: IC2.5 R3.1 | length 436.9
  Top Layer w6: IC2.5 620.02,1166.02 644,1190 758,1190 900,1048 R3.1
NetIC3_7: IC3.7 IC4.1
NetLED1_2: LED1.2 LED2.4 | length 485
  Top Layer w6: LED1.2 2326.39,755.61 2413,669 2413,558 2499.61,471.39 LED2.4
NetLED1_4: LED1.4 R4.2 | length 272.3
  Top Layer w6: R4.2 2440.1,770.9 2499.61,711.39 LED1.4
NetLED2_2: LED2.2 LED3.4
NetLED3_2: LED3.2 LED4.4
RESET: C3.2 IC5.29 J3.B6 J3.E5 R13.1 S1.3 S1.4 | length 290
  Top Layer w6: S1.4 v1(376.74,2008.23)
RX: IC5.30 J3.C1 R1.2
SCK: IC5.17 J3.D6 J3.E3 R4.1 R14.2 | length 320.6
  Top Layer w6: R4.1 2327.9,970.42 J3.E3
SCL: IC3.10 IC5.28 J3.A6 J3.D10 R10.1 | length 1122.5
  Top Layer w6: R10.1 J3.D10 ; IC5.28 2489.67,177.06 2489.67,160.33 J3.A6
SDA: IC3.9 IC5.27 J3.A5 J3.D9 R11.1 | length 1068
  Top Layer w6: R11.1 J3.D9 ; IC5.27 2400,222.19 J3.A5
SS: IC5.14 J3.D3
TX: IC5.31 J3.C2 R3.2
USBDM: D4.4 IC2.16 | length 859.8
  Top Layer w6: IC2.16 480.24,1370.75 686,1576.51 686,1764 585.35,1864.65 D4.4
USBDP: D4.3 IC2.15 | length 592.5
  Top Layer w6: IC2.15 483.2,1396.34 547.4,1460.54 D4.3
Vcc: C1.1 C4.2 C7.2 C9.2 C10.2 C11.2 C12.2 C13.2 C17.2 IC1.3 IC3.8 IC4.5 IC4.8 IC5.4 IC5.6 IC5.18 J3.B4 J3.B7 J3.E2 J4.2 LED1.1 LED2.1 LED3.1 LED4.1 R5.2 R6.2 R7.2 R8.2 R9.2 R10.2 R11.2 R13.2 | length 4827.8
  Top Layer w20: R8.2 55,1400 96.43,1358.57 96.75,1358.57 113,1342.32 113,1022 161.1,973.9 ; IC1.3 208.39,320 101.06,320 C1.1 100,615 55,660 R7.2 56,973.9 161.1,973.9 ; J4.2 682.83,1040 666.83,1024 539,1024 508,993 508,928.76 471.24,892 370,892 302,960 R6.2 175,960 161.1,973.9 ; R10.2 R11.2 ; J3.B7 1250,200 1450,200 J3.B4 ; IC5.18 1720.64,933 ; IC5.6 1841.19,1009 1796.64,1009 1720.64,933 ; IC5.4 1854.27,933 1720.64,933 ; IC4.8 2416,1754 2398,1736 2398,1621 2415,1604 IC4.5 ; LED2.1 2574.5,586.61 C7.2 2624.12,587.12 2654,617 2654,802 ; LED1.1 2629.39,826.61 2654,802 ; C11.2 2544.88,1604 IC4.5 ; IC4.5 2457.28,1396.26 J3.E2 2672,1181.54 2672,954 2654,936 2654,802
VUSB: D4.5 F1.1 J2.1 | length 458.6
  Top Layer w20: J2.1 486.5,1811.5 ; D4.5 510,1835 486.5,1811.5 ; F1.1 631.77,1768.23 588.5,1811.5 486.5,1811.5
pads on no net: IC2.3 IC2.6 IC2.8 IC2.9 IC2.10 IC2.11 IC2.12 IC2.13 IC2.14 IC2.24 IC2.27 IC2.28 IC3.2 IC4.2 IC4.3 IC4.6 IC4.7 IC5.19 IC5.22 J1.3 J2.4 J3.B1 J3.B8 J3.G LED4.2
copper on no net:
  other v3: 550,150 2600,350 2600,1450 600,2050

## Polygon pours and split planes (outlines as drawn)
no net on Layer 1 (split plane): 2579.9,2141.68 2579.9,1640 2580.29,1636.08 2581.43,1632.31 2583.29,1628.83 2585.79,1625.79 2679.9,1531.68 2679.9,258.32 2585.79,164.21 2583.29,161.17 2581.43,157.69 2580.29,153.92 2579.9,150 2579.9,20.1 20.1,20.1 20.1,2179.9 2541.68,2179.9
no net on Layer 2 (split plane): 2579.9,2141.68 2579.9,1640 2580.29,1636.08 2581.43,1632.31 2583.29,1628.83 2585.79,1625.79 2679.9,1531.68 2679.9,258.32 2585.79,164.21 2583.29,161.17 2581.43,157.69 2580.29,153.92 2579.9,150 2579.9,20.1 20.1,20.1 20.1,2179.9 2541.68,2179.9

## Text inside footprints (layer, text, board x,y; h text height)
J3: Top Overlay "0" at 2525,1940 h50 r90; Top Overlay "Digital (PWM~)" at 1920,1850 h50; Top Overlay "1" at 2425,1955 h50 r90; Top Overlay "2" at 2325,1940 h50 r90; Top Overlay "3" at 2225,1940 h50 r90; Top Overlay "4" at 2125,1940 h50 r90; Top Overlay "5" at 2025,1940 h50 r90; Top Overlay "6" at 1925,1940 h50 r90; Top Overlay "7" at 1825,1940 h50 r90; Top Overlay "A5" at 2515,235 h50 r90; Top Overlay "A4" at 2415,235 h50 r90; Top Overlay "A2" at 2215,235 h50 r90; Top Overlay "A3" at 2315,235 h50 r90; Top Overlay "A1" at 2115,235 h50 r90; Top Overlay "Analog" at 1965,380 h50; Top Overlay "A0" at 2015,235 h50 r90; Top Overlay "8" at 1665,1940 h50 r90; Top Overlay "GND" at 1715,235 h50 r90; Top Overlay "Vin" at 1815,235 h50 r90; Top Overlay "~9" at 1565,1890 h50 r90; Top Overlay "GND" at 1615,235 h50 r90; Top Overlay "5v" at 1515,235 h50 r90; Top Overlay "~10" at 1465,1850 h50 r90; Top Overlay "12" at 1265,1900 h50 r90; Top Overlay "~11" at 1365,1865 h50 r90; Top Overlay "13" at 1165,1900 h50 r90; Top Overlay "RESET" at 1315,235 h50 r90; Top Overlay "3v3" at 1415,235 h50 r90; Top Overlay "IOREF" at 1215,235 h50 r90; Top Overlay "SDA" at 865,1840 h50 r90; Top Overlay "GND" at 1065,1840 h50 r90; Top Overlay "SCL" at 765,1840 h50 r90; Top Overlay "AREF" at 965,1790 h50 r90